# Altium PCB PCBbeeldscherm.PcbDoc
Units mil, origin at the board's own origin, x right, y up, seen from the top; angles counter-clockwise.
Board outline 2420 x 3085 mil, 2 copper layers (Top Layer, Bottom Layer); 12 components, 76 nets, 65 pads, 2 vias.
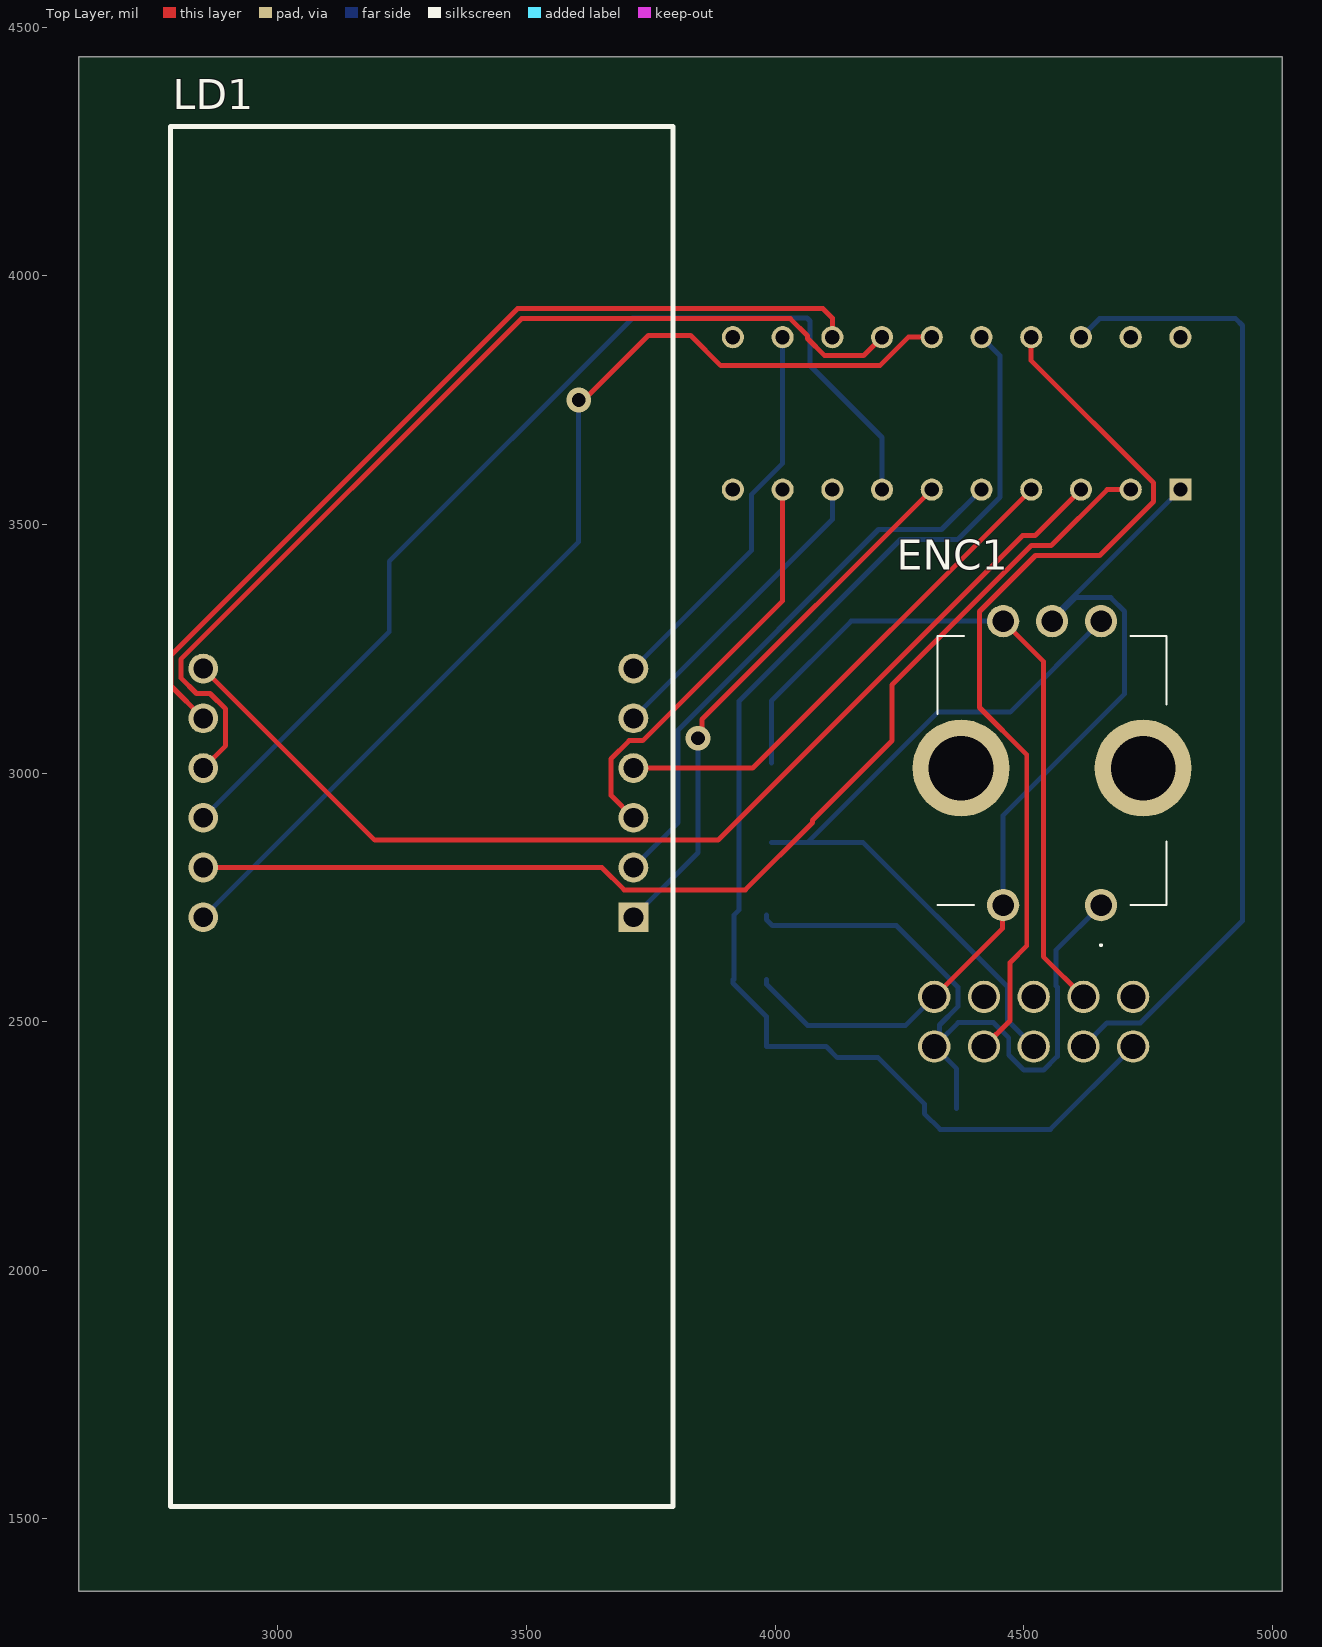
[diagram p0: Top Layer view]
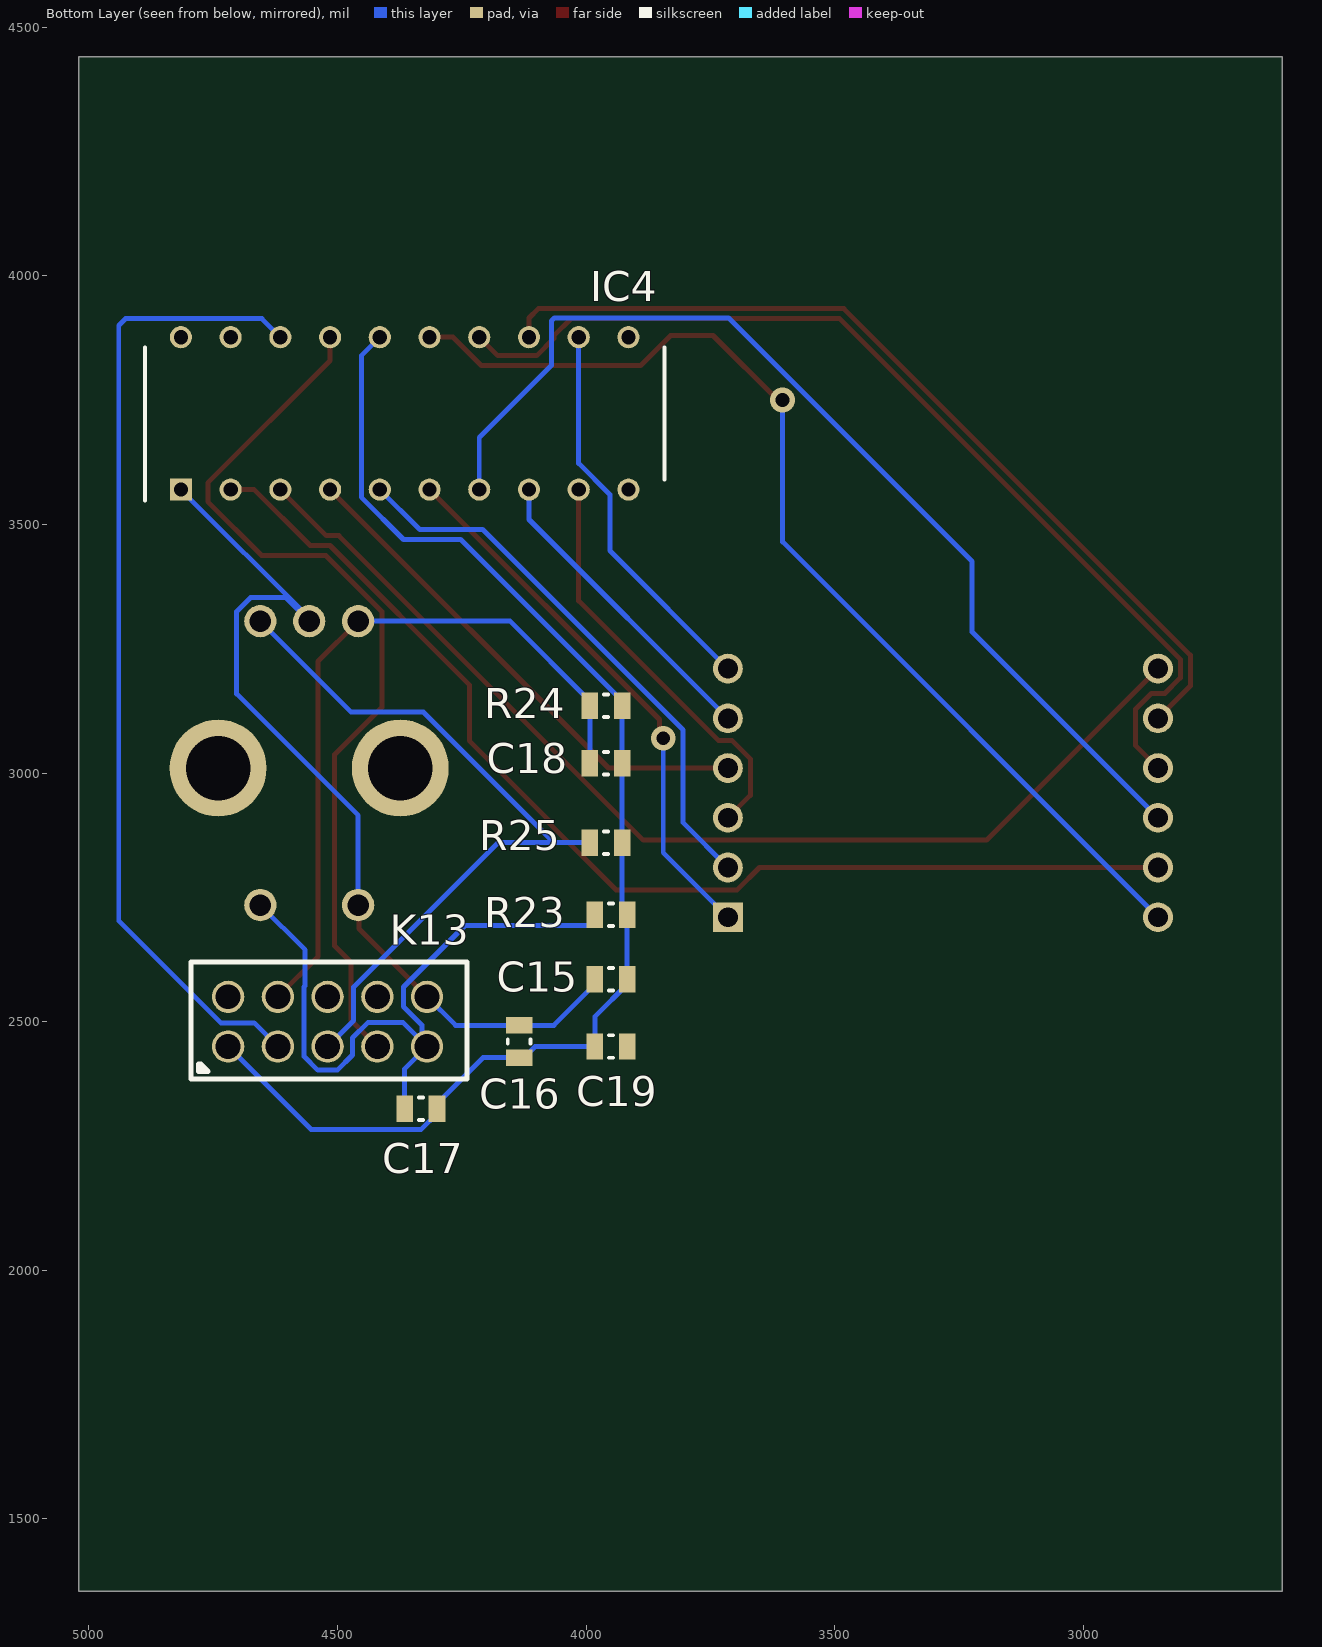
[diagram p1: Bottom Layer view, seen from below]

## Layer stack, top to bottom
Top Solder: solder mask 0.4, Solder Resist, Dk 3.5
Top Layer: signal copper 1.4
Dielectric 1: dielectric 12.6, FR-4, Dk 4.8
Bottom Layer: signal copper 1.4
Bottom Solder: solder mask 0.4, Solder Resist, Dk 3.5

## Board outline
2600,1355 5020,1355 5020,4440 2600,4440

## Design rules (kind name [scope] priority, off if disabled: settings)
Clearance [All] p1: gap=10 ignorepadtopadclearanceinfootprint=FALSE except(0: Arc-Hole Track-Hole SMDPad-Hole THPad-Hole Via-Hole Fill-Hole Poly-Hole Region-Hole Text-Hole)
PolygonConnect [All] p1: connectstyle=Relief reliefconductorwidth=10 reliefentries=4 polygonreliefangle="90 Angle" airgapwidth=10
RoutingVias [All] p1: holewidth=28 width=50 viastyle="Through Hole" minholewidth=28 minwidth=50 maxholewidth=28 maxwidth=50
SolderMaskExpansion [All] p1: expansion=4 istentingtop=FALSE
Width [All] p1: maxlimit=10 minlimit=10 preferedwidth=10
30 further rules are at their usual default settings.

## Classes and differential pairs
component class display: C15 C16 C17 C18 C19 ENC1 IC4 R23 R24 R25

## Components (designator, comment, footprint, x,y, rotation, side; value= is the part's Value field where it differs from the comment)
C15 "100µ,50v" RESC2013X50X30LL20T20 3950,2585 r0 bottom value="0.10 μF"
C16 "100n" RESC2013X50X30LL20T20 4135,2460 r90 bottom
C17 "10n" RESC2013X50X30LL20T20 4332.48,2325 r0 bottom
C18 "10n" RESC2013X50X30LL20T20 3960,3020 r0 bottom
C19 "10n" RESC2013X50X30LL20T20 3950,2450 r180 bottom
ENC1 "Switch" 482009514001 4655.35,2734.41 r90 top
IC4 "TM1637" DIP778W53P254L2612H431Q20N 4365,3723.23 r90 bottom
K13 "Pinheader,2rijig,10-polig" "PINHEADER, 2RIJIG,10-POLIG - duplicate - duplicate - duplicate" 4720,2450 r180 bottom
LD1 "7segdisplay" 7SEGDISPALY 3715,2710 r90 top
R23 "weerstand" RESC2013X50X30LL20T20 3950,2715 r180 bottom
R24 "weerstand" RESC2013X50X30LL20T20 3960,3135 r180 bottom
R25 "weerstand" RESC2013X50X30LL20T20 3960,2860 r180 bottom

## Footprints (in the part's own frame and the unit in brackets; to place one, negate y for a bottom-side part, rotate by r counter-clockwise, add the part's x,y. Pads: shape width x height; smd on the part's side, far side on the other; paste and mask are expansions set on the pad)
7SEGDISPALY [mil]
  rect 60x60 hole 40: 1(0,0)
  round 60 hole 40: 2(100,0) 3(200,0) 4(300,0) 5(400,0) 6(500,0) 7(500,865) 8(400,865) 9(300,865) 10(200,865) 11(100,865) 12(0,865)
  silkscreen extent -1185,-80 1590,931
482009514001 [mm]
  round 1.65 hole 1.1: 1(0,0) 2(0,5) A1(14.5,0) B1(14.5,5) C1(14.5,2.5)
  round 4.95 hole 3.3: MH1(7,7.15) MH2(7,-2.15)
  silkscreen extent -2.1,-3.35 13.75,8.35, body extent -0.45,-3.69 14.95,8.69, height 26.7
DIP778W53P254L2612H431Q20N [mm]
  rect 1.13x1.13 hole 0.73: 1(-3.892,11.43)
  round 1.13 hole 0.73: 2(-3.892,8.89) 3(-3.892,6.35) 4(-3.892,3.81) 5(-3.892,1.27) 6(-3.892,-1.27) 7(-3.892,-3.81) 8(-3.892,-6.35) 9(-3.892,-8.89) 10(-3.892,-11.43) 11(3.892,-11.43) 12(3.892,-8.89) 13(3.892,-6.35) 14(3.892,-3.81) 15(3.892,-1.27) 16(3.892,1.27) 17(3.892,3.81) 18(3.892,6.35) 19(3.892,8.89) 20(3.892,11.43)
  silkscreen extent -4.46,-13.27 3.37,13.27, body extent -4.03,-13.06 4.03,13.06, height 4.31
"PINHEADER, 2RIJIG,10-POLIG - duplicate - duplicate - duplicate" [mil]
  round 65 hole 50: 1(0,0) 2(100,0) 3(200,0) 4(300,0) 5(400,0) 6(0,100) 7(100,100) 8(200,100) 9(300,100) 10(400,100)
  silkscreen extent -75,-65 480,170
RESC2013X50X30LL20T20 [mm] "Chip Resistor, 2-Leads, Body 2.00x1.25mm, IPC High Density"
  rect 0.85x1.35 smd: 1(-0.825,0) 2(0.825,0)
  silkscreen extent -0.1,-0.58 0.1,0.58, body extent -1.1,-0.72 1.1,0.72, height 0.5

## Part data
C15: library part "Elektrolytische Capacitor", "CAP CER 0.1UF 10V X5R 0402", Capacitance="0.10 μF", Manufacturer=Kemet, Manufacturer Part Number=C0402C104K8PACTU, Package=C0402-BB, Temperature="-55°C to +125°C", Temperature Characteristic=X5R, Temperature Coefficient=15%, Temperature Range High=+125°C, Temperature Range Low=-55°C, Tolerance=0.1, Voltage Rating="10 V", Automotive=No, Category=Cap, ComponentLink2Description=Datasheet, ComponentLink2URL=https://content.kemet.com/datasheets/KEM_C1002_X7R_SMD.pdf, Device Class L1="Passive Components", Device Class L2=Capacitors, Device Class L3="Ceramic Capacitors", Digikey Description="CAP CER 0.1UF 10V X5R 0402", Height=0.55mm, Ipc Land Pattern Name=CAPC10050X50, Lead Free=Yes, Material=Ceramic, Mouser Description="Capacitor 100 nF 10 VDC 0402 | KEMET C0402C104K8PACTU (Capacitor 100 nF 10 VDC 0402 Ceramic Capacitors).", Octopart=https://octopart.com/c0402c104k8pactu-kemet-140039, RoHS=TRUE
C16 C17 C18 C19: library part "Ceramische Capacitor"
ENC1: Manufacturer_Name="Wurth Elektronik", Manufacturer_Part_Number=482009514001, Mouser Part Number=710-482009514001, Height=26.6mm, Mouser Price/Stock=https://www.mouser.co.uk/ProductDetail/Wurth-Elektronik/482009514001?qs=2WXlatMagcFsR1YvhlUIOw%3D%3D
IC4: "Integrated Circuit", Manufacturer_Name="TITAN MICRO ELECTRONICS", Height=4.31mm, Manufacturer_Part_Number=TM1637
R23 R24 R25: Manufacturer="Vishay Dale", Part Number=CRCW08050000Z0EA

## Via types
v1: diameter 50, hole 28, Top Layer to Bottom Layer, 2 vias

## Nets (pads, with @x,y where several pads share a name; then routed paths per layer and width w, separated by ;. In a path a pad name is that pad's centre, name@x,y a point inside that pad or via, vN(x,y) a via of type N, cw(c..) or ccw(c..) an arc to the next point about the centre after c; other vN are vias at no path point)
+5V: C15.1 C16.1 C17.1 C18.1 C19.1 IC4.16 K13.1 R23.2 R24.2 R25.2 | length 2645.7
  Bottom Layer w10: C15.1@3915,2585 3915,2577.68 3982.48,2510.2 C19.1 4102.68,2450 4125.16,2427.52 C16.1 4207.32,2427.52 4300,2334.84 C17.1 4300,2315.16 4331.73,2283.43 4553.43,2283.43 K13.1 ; C15.1 R23.2 3927.52,2725 R25.2 C18.1 R24.2 3927.52,3144.84 4252.24,3469.57 4367.24,3469.57 4452.24,3554.57 4452.24,3839.21 IC4.16
GND: C15.2 C16.2 ENC1.2 ENC1.C1 IC4.1 K13.10 | length 1887.7
  Top Layer w10: K13.10 4456.93,2686.93 4456.93,2732.83 ENC1.2
  Bottom Layer w10: C15.2 3982.48,2575.16 4065.16,2492.48 C16.2 4262.48,2492.48 K13.10 ; ENC1.2 4458.5,2914.95 4702.83,3159.28 4702.83,3324.94 4675.02,3352.76 4604.41,3352.76 ENC1.C1 4556.93,3311.93 IC4.1
NetB1_2: 
NetB1_4: 
NetB2_2: 
NetB2_3: 
NetC6_1: 
NetC7_1: 
NetC8_1: 
NetC11_1: 
NetC12_1: 
NetC13_1: 
NetC14_1: 
NetC14_2: 
NetC17_2: C17.2 ENC1.1 K13.5 R23.1 | length 1400
  Bottom Layer w10: R23.1 3982.48,2705.16 3994.21,2693.43 4243.75,2693.43 4367.5,2569.68 4367.5,2530.32 4330.52,2493.35 K13.5@4330.52,2460.52 ; C17.2 4364.96,2405.04 K13.5 K13.5@4330.52,2460.52 ; ENC1.1 4565.23,2644.28 4565.23,2571.95 4567.5,2569.68 4567.5,2430.32 4539.68,2402.5 4500.32,2402.5 4469.79,2433.04 4469.79,2467.39 4439.25,2497.92 4367.92,2497.92 K13.5@4330.52,2460.52
NetC18_2: C18.2 ENC1.B1 K13.7 R24.1 | length 1479.5
  Top Layer w10: ENC1.B1 4539.25,3224.53 4539.25,2630.75 K13.7
  Bottom Layer w10: C18.2 R24.1 3992.48,3144.84 4152.91,3305.28 ENC1.B1
NetD1_2: 
NetD2_1: 
NetENC1_A1: ENC1.A1 K13.3 R25.1 | length 1511.6
  Bottom Layer w10: R25.1 4064.84,2860 ; K13.3 4467.5,2502.5 4467.5,2569.68 4177.18,2860 4064.84,2860 ; ENC1.A1 4472.52,3122.44 4327.28,3122.44 4064.84,2860
NetIC2_1: 
NetIC2_2: 
NetIC2_6: 
NetIC2_7: 
NetIC4_2: IC4.2 LD1.11 | length 2285.7
  Top Layer w10: LD1.11 3651.36,2810 3696.36,2765 3940,2765 4075,2900 4075,2905 4235,3065 4235,3177.2 4515.27,3457.47 4555.14,3457.47 4667.67,3570 IC4.2
NetIC4_3: IC4.3 LD1.7 | length 2199.9
  Top Layer w10: LD1.7 3195,2865 3885,2865 4497.47,3477.47 4522.47,3477.47 IC4.3
NetIC4_4: IC4.4 LD1.4 | length 1032
  Top Layer w10: LD1.4 3955,3010 IC4.4
NetIC4_5: IC4.5 LD1.2 | length 1124.1
  Bottom Layer w10: LD1.2 3805,2900 3805,3086.57 4208,3489.57 4334.57,3489.57 IC4.5
NetIC4_6: IC4.6 LD1.1 | length 1108.5
  Top Layer w10: v1(3845,3070) 3852.65,3077.65 3852.65,3107.65 IC4.6
  Bottom Layer w10: LD1.1 3845,2840 v1(3845,3070)
NetIC4_7: IC4.7 LD1.10 | length 2120.8
  Bottom Layer w10: LD1.10 3224,3284 3224,3425.57 3713.43,3915 4064.14,3915 4070,3909.14 4070,3819.67 4215,3674.67 IC4.7
NetIC4_8: IC4.8 LD1.5 | length 625.7
  Bottom Layer w10: LD1.5 4115,3510 IC4.8
NetIC4_9: IC4.9 LD1.3 | length 837.5
  Top Layer w10: LD1.3 3670,2955 3670,3028.64 3706.36,3065 3733.64,3065 4015,3346.36 IC4.9
NetIC4_12: IC4.12 LD1.6 | length 790.7
  Bottom Layer w10: LD1.6 3952.24,3447.24 3952.24,3559.92 4015,3622.67 IC4.12
NetIC4_13: IC4.13 LD1.8 | length 1818.8
  Top Layer w10: LD1.8 2785,3175 2785,3236.92 3481.78,3933.7 4096.3,3933.7 4115,3915 IC4.13
NetIC4_14: IC4.14 LD1.9 | length 2033.7
  Top Layer w10: LD1.9 2895,3055 2895,3128.64 2863.64,3160 2836.36,3160 2805,3191.36 2805,3228.64 3490.06,3913.7 4030.43,3913.7 4065,3879.13 4065,3873.79 4099.57,3839.21 4177.76,3839.21 IC4.14
NetIC4_15: IC4.15 LD1.12 | length 2165.5
  Top Layer w10: v1(3605,3750) 3615,3750 3745,3880 3830,3880 3890.79,3819.21 4210.43,3819.21 4267.67,3876.46 IC4.15
  Bottom Layer w10: LD1.12 3605,3465 v1(3605,3750)
NetIC4_17: IC4.17 K13.4 | length 1823.7
  Top Layer w10: K13.4 4472.5,2502.5 4472.5,2618.99 4505.98,2652.47 4505.98,3036.89 4411.02,3131.85 4411.02,3324.94 4523.55,3437.47 4652.47,3437.47 4760.86,3545.86 4760.86,3583.56 4515,3829.42 IC4.17
NetIC4_18: IC4.18 K13.2 | length 1968
  Bottom Layer w10: IC4.18 4652.24,3913.7 4926.3,3913.7 4940,3900 4940,2702.82 4734.68,2497.5 4667.5,2497.5 K13.2
NetIC_1: 
NetIC_2: 
NetIC_7: 
NetIC_8: 
NetIC_12: 
NetIC_13: 
NetIC_14: 
NetIC_15: 
NetIC_16: 
NetIC_19: 
NetIC_20: 
NetIC_21: 
NetIC_22: 
NetIC_23: 
NetIC_24: 
NetIC_27: 
NetIC_28: 
NetIC_30: 
NetIC_33: 
NetIC_34: 
NetIC_35: 
NetIC_36: 
NetIC_37: 
NetIC_38: 
NetIC_39: 
NetIC_40: 
NetK2_1: 
NetK3_1: 
NetK8_1: 
NetK8_2: 
NetL2_1: 
NetR7_2: 
NetR11_2: 
NetR17_2: 
NetR18_1: 
NetR18_2: 
NetR19_2: 
VCC: 
VIN: 
pads on no net: C19.2 ENC1.MH1 ENC1.MH2 IC4.10 IC4.11 IC4.19 IC4.20 K13.6 K13.8 K13.9
copper on no net: | length 5
  Top Layer w10: 4715,3565 4715,3570